# Altium PCB PCB2.PcbDoc
Units mil, origin at the board's own origin, x right, y up, seen from the top; angles counter-clockwise.
Board outline 4880 x 3300 mil, 2 copper layers (Top Layer, Bottom Layer); 26 components, 31 nets, 148 pads, 26 vias.
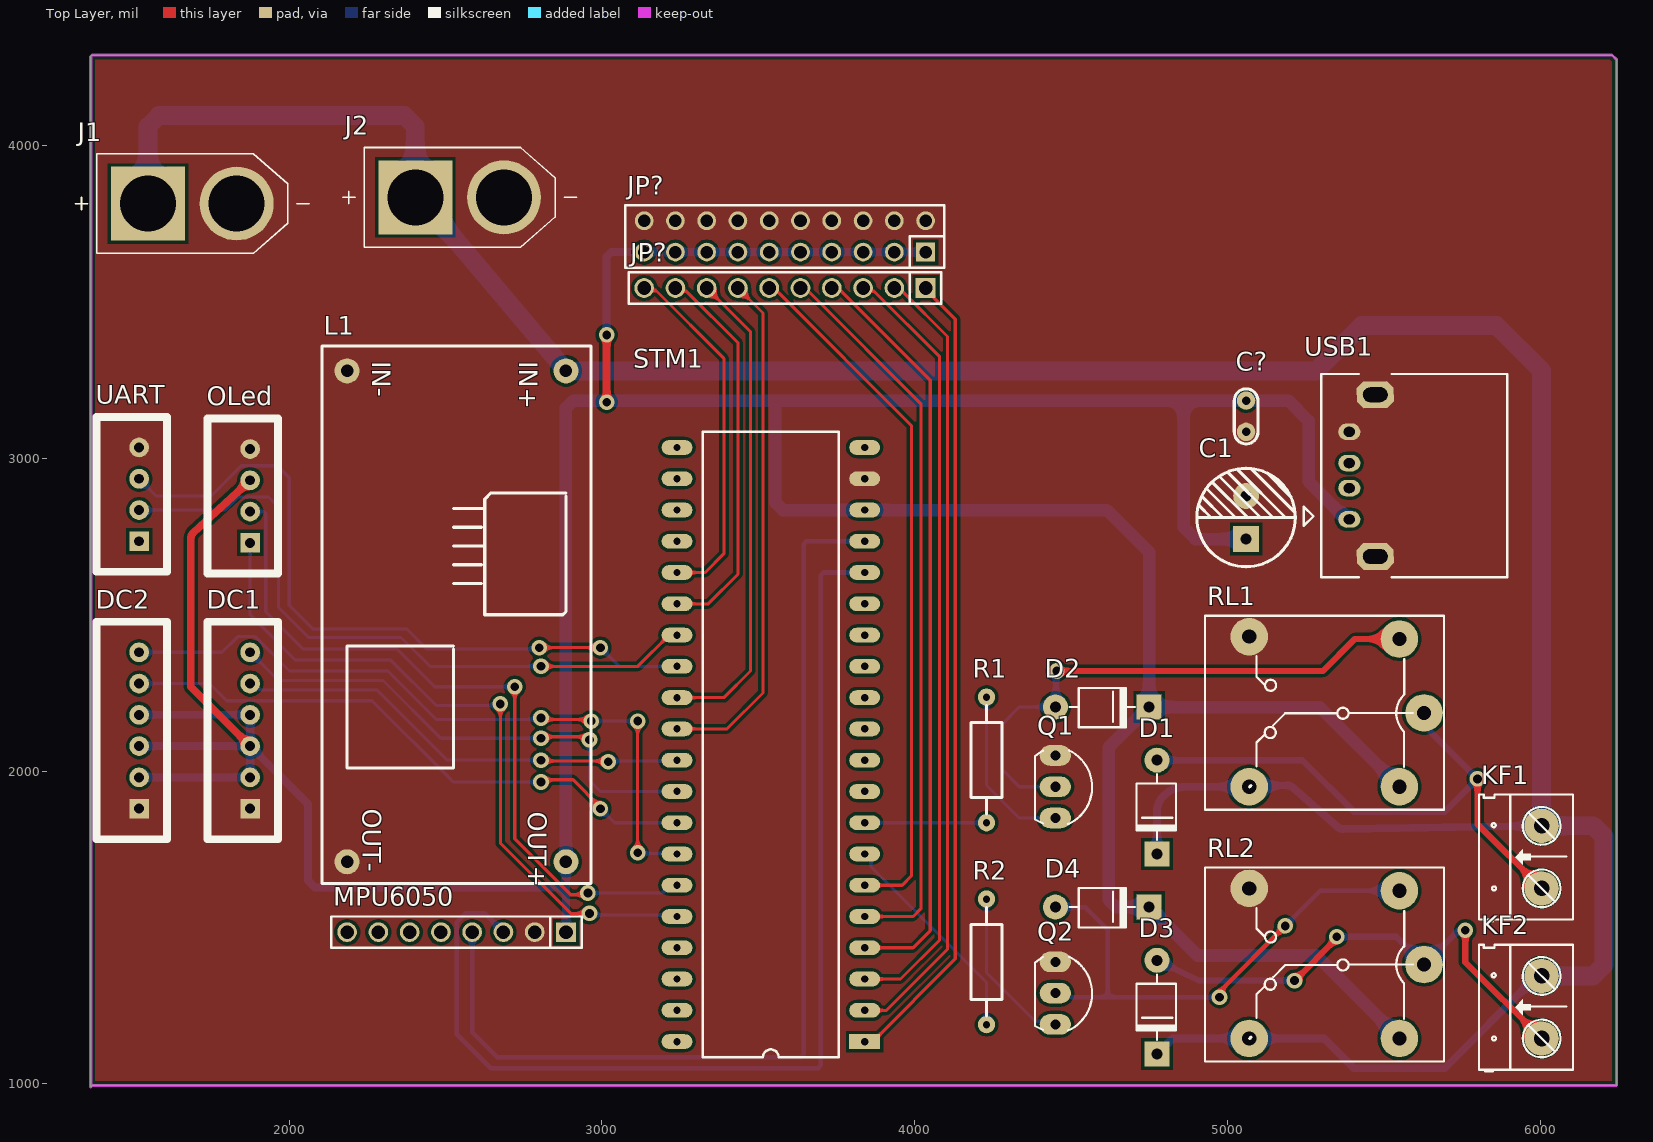
[diagram p0: Top Layer view]
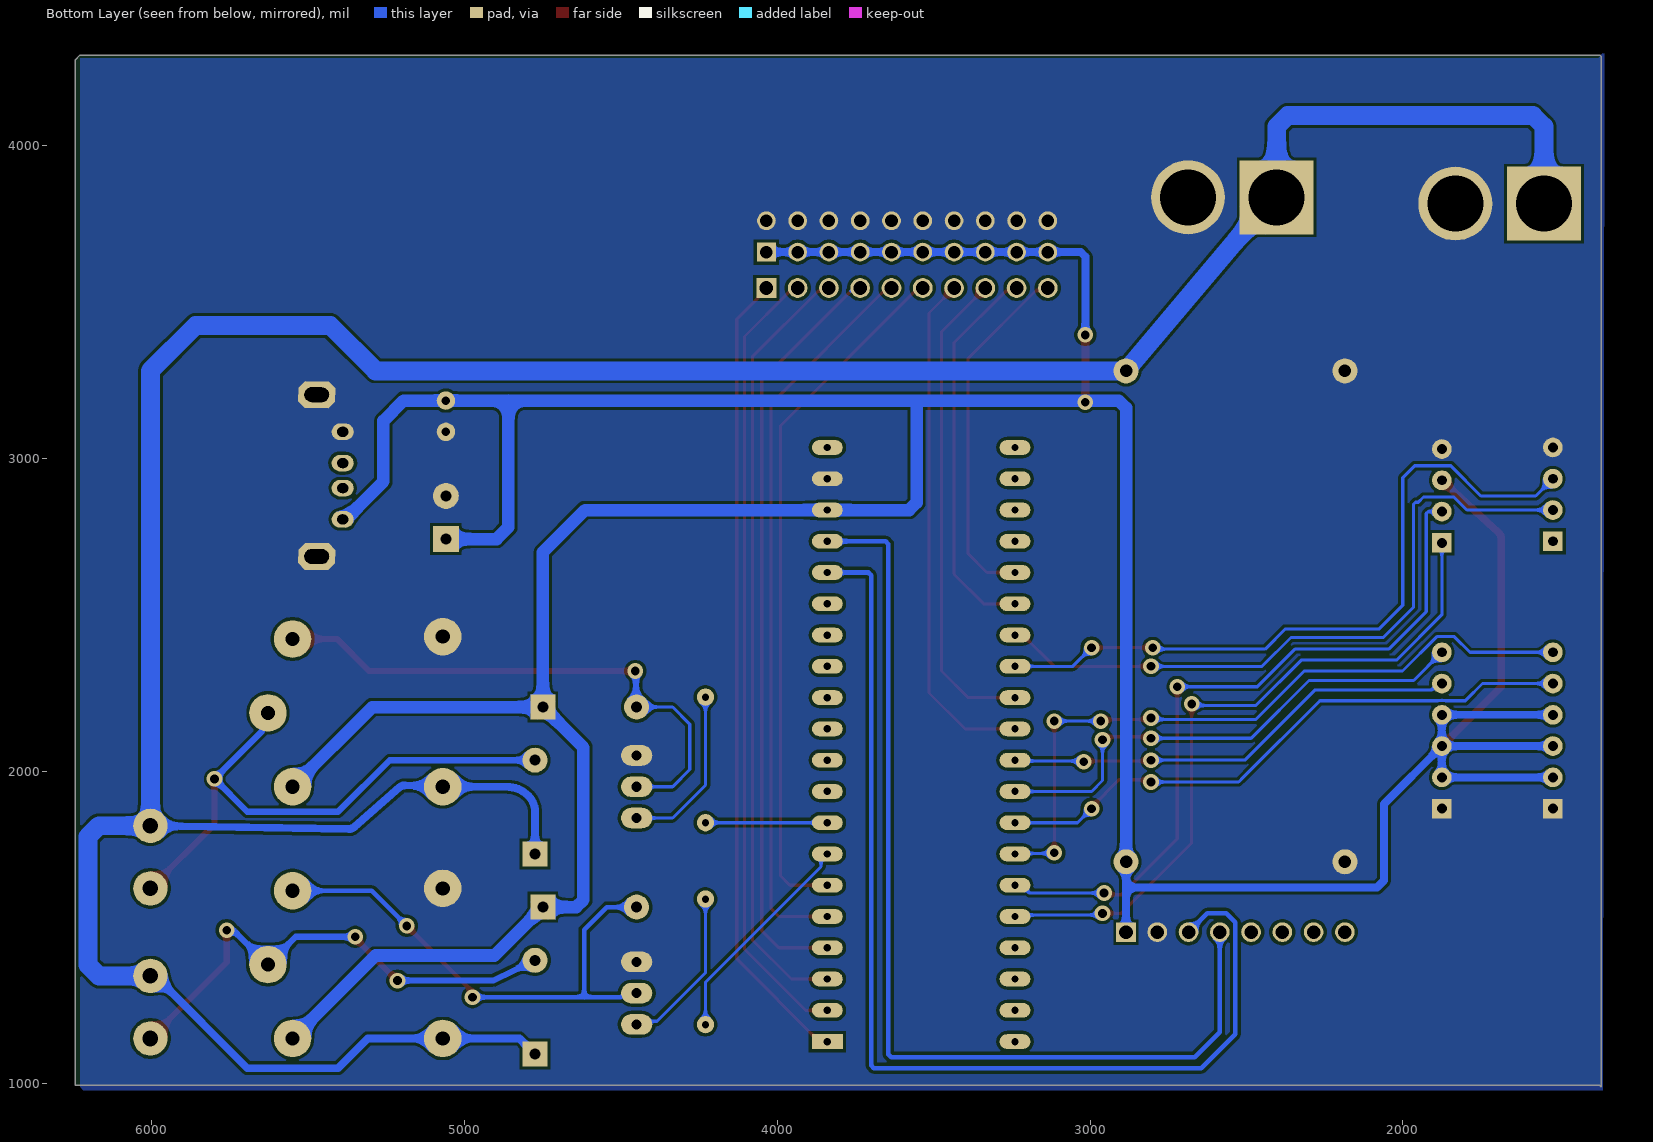
[diagram p1: Bottom Layer view, seen from below]
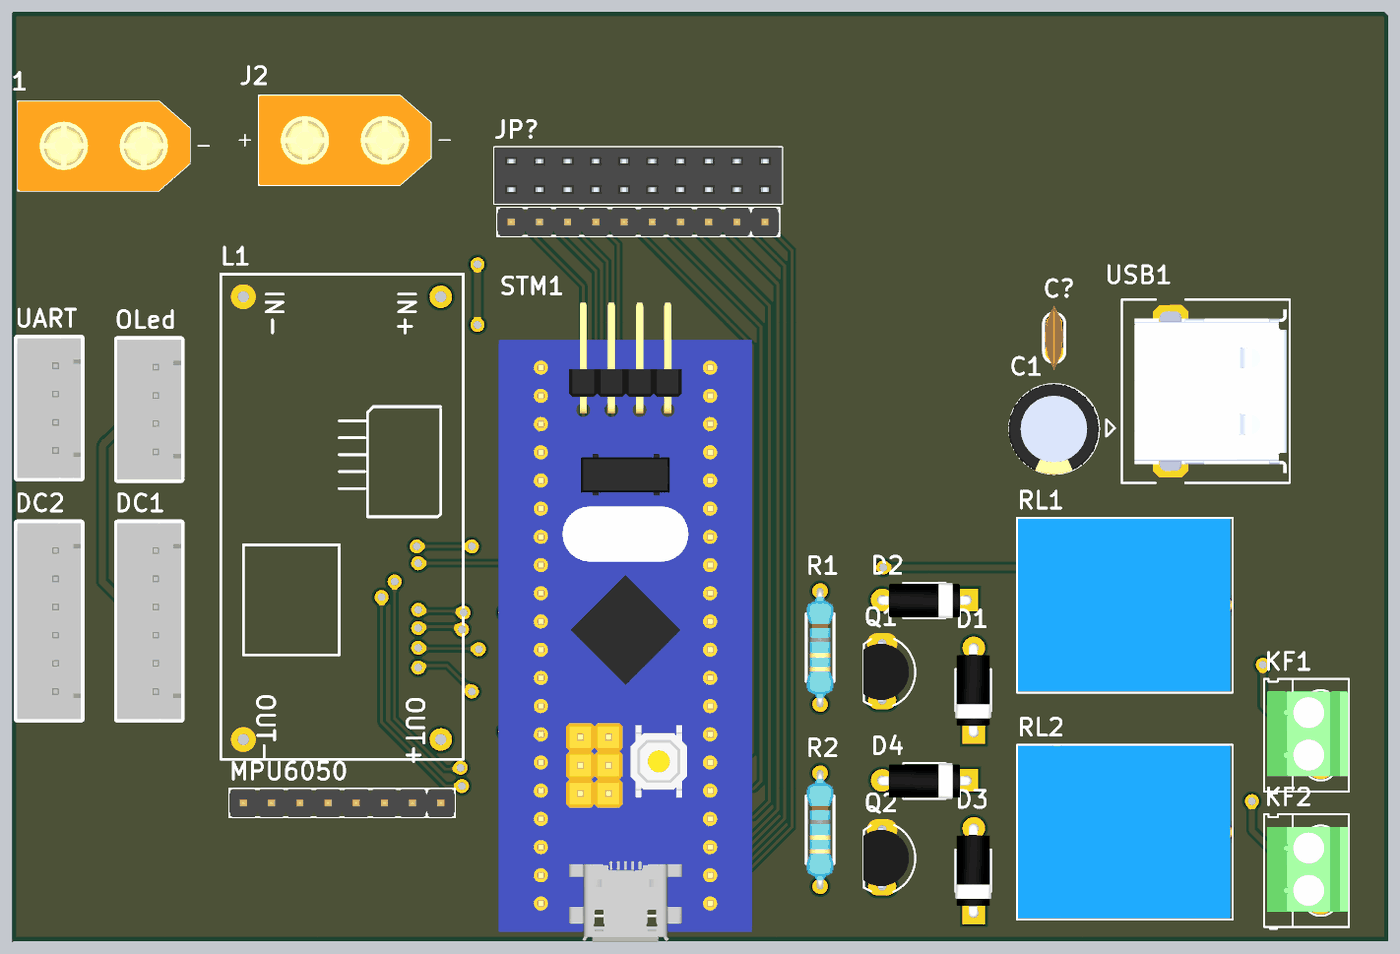
[diagram p2: 3D render of the assembled board from above, using the file's embedded part models]

## Layer stack, top to bottom
Top Solder: solder mask 0.4, Solder Resist, Dk 3.5
Top Layer: signal copper 1.4
Dielectric 1: dielectric 12.6, FR-4, Dk 4.8
Bottom Layer: signal copper 1.4
Bottom Solder: solder mask 0.4, Solder Resist, Dk 3.5

## Board outline
1365,990 1370,995 6245,995 6245,4275 6230,4290 1370,4290 1365,4285

## Design rules (kind name [scope] priority, off if disabled: settings)
Clearance [All] p1: gap=10 ignorepadtopadclearanceinfootprint=FALSE except(0: Arc-Hole Track-Hole SMDPad-Hole THPad-Hole Via-Hole Fill-Hole Poly-Hole Region-Hole Text-Hole)
ComponentClearance [All] p1: gap=0 collisioncheckmode=3 verticalgap=0 showdistances=FALSE
PolygonConnect PolyConnect_Power [InNetClass('Power')] p1: connectstyle=Direct reliefconductorwidth=10 reliefentries=4 polygonreliefangle="90 Angle" airgapwidth=10
PolygonConnect [All] p2: connectstyle=Relief reliefconductorwidth=10 reliefentries=4 polygonreliefangle="90 Angle" airgapwidth=10
RoutingVias [All] p1: holewidth=28 width=50 viastyle="Through Hole" minholewidth=28 minwidth=50 maxholewidth=28 maxwidth=50
SolderMaskExpansion [All] p1: expansion=4 istentingtop=FALSE
Width [InNetClass('Power')] p1: maxlimit=60 minlimit=25 preferedwidth=40
Width Width_1 [All] p2: maxlimit=20 minlimit=10 preferedwidth=15
29 further rules are at their usual default settings.

## Classes and differential pairs
net class Power: +5 +12 GND

## Components (designator, comment, footprint, x,y, rotation, side; value= is the part's Value field where it differs from the comment)
C1 "470uF" "tu hoa 8mm" 5060,2811.1 r90 top
C? "104" "tu gom" 5060,3135 r90 top
D1 "100v" "DIODE 1A" 4775,2085 r90 top
D2 "100v" "DIODE 1A" 4400,2205 r180 top
D3 "100v" "DIODE 1A" 4775,1445 r90 top
D4 "100v" "DIODE 1A" 4400,1565 r180 top
DC1 "Header 6P 2.54 Duc Thang" XH2.54M-6 1875,1880 r90 top
DC2 "Header 6P 2.54 Duc Thang" XH2.54M-6 1520,1880 r90 top
J1 "XT60-M" AMASS_XT60-M 1690,3815 r0 top
J2 "XT60-M" AMASS_XT60-M 2545,3835 r0 top
JP? "JP 1x10 2.54" "JP 1x10 DT" 4035,3545 r180 top
JP? "JP 2x10 2.54" "JP 2x10 CT" 3585,3710 r180 top
KF1 "CON 2 KF301" "Con 2 KF301 5.08" 6005,1625 r90 top
KF2 "CON 2 KF301" "Con 2 KF301 5.08" 6005,1145 r90 top
L1 "BUCK_LM2596" BUCK_LM2596 2565,2510 r270 top
MPU6050 "JP 1x8 2.54" "JP 1x8 DT" 2885,1485 r180 top
OLed "Header 4P 2.54 Duc Thang" XH2.54M-4 1875,2730 r90 top
Q1 "C1815" TO92 4450,1950 r270 top value=C9014
Q2 "C1815" TO92 4450,1290 r270 top value=C9014
R1 "1k" "tro vach 1/4w" 4230,2035.79 r90 top
R2 "1k" "tro vach 1/4w" 4230,1390 r90 top
RL1 "Relay" "Relay 5 Chan SRD" 5629.06,2186.22 r180 top
RL2 "Relay" "Relay 5 Chan SRD" 5629.06,1381.22 r180 top
STM1 "KIT STM32F103C8T6" "STM32F103 KIT" 3840,1135 r180 top
UART "Header 4P 2.54 Duc Thang" XH2.54M-4 1520,2735 r90 top
USB1 "USB A CN DIP" "USB A CN DIP" 5560,2940 r270 top

## Footprints (in the part's own frame and the unit in brackets; to place one, negate y for a bottom-side part, rotate by r counter-clockwise, add the part's x,y. Pads: shape width x height; smd on the part's side, far side on the other; paste and mask are expansions set on the pad)
AMASS_XT60-M [mm]
  round 6 hole 4.55: N(3.6,0)
  rect 6x6 / inner round 6 / far side rect 6x6 hole 4.55: P(-3.6,0)
  silkscreen extent -9.5,-4.05 9.5,4.05, body extent -7.75,-4.05 7.75,4.05, height 16
BUCK_LM2596 [mil]
  round 80 hole 40: 1(-770,320) 2(-770,-380) 3(800,-380) 4(800,320)
  silkscreen extent -850,-460 870,400
"Con 2 KF301 5.08" [mil]
  round 110 hole 50: 1(0,0) 2(200,0)
  silkscreen extent -106,-100 300,200, body extent -45,-97 255,190, height 335
"DIODE 1A" [mil] "Diode 1A"
  round 80 hole 35: 1(-50,0)
  rect 80x80 hole 35: 2(-350,0)
  silkscreen extent -305,-61 -95,65, body extent -366,-61 -34,65, height 122
"JP 1x8 DT" [mm] "8 pins, 1 row, straight, gold plating"
  rect 1.6x1.6 hole 1.1: 1(0,0)
  round 1.6 hole 1.1: 2(2.54,0) 3(5.08,0) 4(7.62,0) 5(10.16,0) 6(12.7,0) 7(15.24,0) 8(17.78,0)
  silkscreen extent -1.27,-1.27 19.05,1.27, body extent -1.27,-1.27 19.05,1.27, height 8.54
"JP 1x10 DT" [mm] "10 pins, 1 row, straight, gold plating"
  rect 1.6x1.6 hole 1.1: 1(0,0)
  round 1.6 hole 1.1: 2(2.54,0) 3(5.08,0) 4(7.62,0) 5(10.16,0) 6(12.7,0) 7(15.24,0) 8(17.78,0) 9(20.32,0) 10(22.86,0)
  silkscreen extent -1.27,-1.27 24.13,1.27, body extent -1.27,-1.27 24.13,1.27, height 8.54
"JP 2x10 CT" [mm] "20 pins, dual row, straight, gold plating"
  rect 1.52x1.52 hole 1.02: 1(-11.43,1.27)
  round 1.52 hole 1.02: 2(-8.89,1.27) 3(-6.35,1.27) 4(-3.81,1.27) 5(-1.27,1.27) 6(1.27,1.27) 7(3.81,1.27) 8(6.35,1.27) 9(8.89,1.27) 10(11.43,1.27) 11(11.43,-1.27) 12(8.89,-1.27) 13(6.35,-1.27) 14(3.81,-1.27) 15(1.27,-1.27) 16(-1.27,-1.27) 17(-3.81,-1.27) 18(-6.35,-1.27) 19(-8.89,-1.27) 20(-11.43,-1.27)
  silkscreen extent -12.95,-2.54 12.95,2.54, body extent -12.95,-2.54 12.95,2.54, height 8.51
"Relay 5 Chan SRD" [mil] "Relay SPDT, 5 pin, 10A,W 650mil, L 800mil, H 800mil"
  round 120 hole 45: 1(0,0) 2(559.06,236.22) 3(559.06,-243.78) 4(78.74,-236.22) 5(78.74,236.22)
  silkscreen extent -63,-311 700,310, body extent -55,-306 697,304, height 602
"STM32F103 KIT" [mm]
  rect 2.5x1.2 hole 0.6: 1(0,0)
  oval 2.5x1.2 hole 0.6: 2(0,-2.54) 3(0,-5.08) 4(0,-7.62) 5(0,-10.16) 6(0,-12.7) 7(0,-15.24) 8(0,-17.78) 9(0,-20.32) 10(0,-22.86) 11(0,-25.4) 12(0,-27.94) 13(0,-30.48) 14(0,-33.02) 15(0,-35.56) 16(0,-38.1) 17(0,-40.64) 18(0,-43.18) 19(0,-45.72) 20(0,-48.26) 21(15.24,-48.26) 22(15.24,-45.72) 23(15.24,-43.18) 24(15.24,-40.64) 25(15.24,-38.1) 26(15.24,-35.56) 27(15.24,-33.02) 28(15.24,-30.48) 29(15.24,-27.94) 30(15.24,-25.4) 31(15.24,-22.86) 32(15.24,-20.32) 33(15.24,-17.78) 34(15.24,-15.24) 35(15.24,-12.7) 36(15.24,-10.16) 37(15.24,-7.62) 38(15.24,-5.08) 39(15.24,-2.54) 40(15.24,0)
  silkscreen extent 2.08,-49.53 13.16,1.27, body extent -3.81,-53.97 19.05,3.59, height 16.12
TO92 [mil] "TO-92"
  oval 66x100 hole 32: 1(-100,0) 2(0,0) 3(100,0)
  silkscreen extent -117,-65 120,118, body extent -109,-66 109,95, height 245
"tro vach 1/4w" [mm]
  round 1.4 hole 0.6: 1(-5.1,0) 2(5.1,0)
  silkscreen extent -4.39,-1.25 4.42,1.25, body extent -5.38,-1.2 5.38,1.2, height 2.41
"tu gom" [mm] "Tu gom mini"
  round 1.5 hole 0.7: 1(-1.27,0) 2(1.27,0)
  silkscreen extent -2.25,-0.97 2.22,0.97, body extent -2.92,-0.85 2.92,0.85, height 6.12
"tu hoa 8mm" [mm]
  rect 2.1x2.1 hole 0.9: 1(-1.75,0)
  round 2.1 hole 0.9: 2(1.75,0)
  silkscreen extent -4,-4 4,4, body extent -4.1,-4.07 4.1,4.13, height 13.81
"USB A CN DIP" [mm] "THT, USB 2.0 A Connector, 4Pin, Body 15.8 x14.5mm"
  oval 1.35x1.8 hole 0.8 slot 0.9 at 90.92 deg rot 0.92: 1(3.429,-4.318) 2(0.889,-4.318) 3(-1.143,-4.318) 4(-3.683,-4.318)
  oct 2.2x3 hole 1.2 slot 2 at 90.92 deg rot 0.92: 4(-6.697,-2.206) 4(6.443,-2.206)
  silkscreen extent -8.38,-8 8.13,8.51, body extent -8.03,-5.46 7.77,8.24, height 6.97
XH2.54M-4 [mm]
  rect 1.6x1.6 hole 0.8: 1(0,0)
  round 1.6 hole 0.8: 2(2.54,0) 3(5.08,0) 4(7.62,0)
  silkscreen extent -2.48,-2.26 10.1,3.46, body extent -2.48,-2.26 10.1,3.48, height 6.91
XH2.54M-6 [mm]
  rect 1.6x1.6 hole 0.8: 1(0,0)
  round 1.6 hole 0.8: 2(2.54,0) 3(5.08,0) 4(7.62,0) 5(10.16,0) 6(12.7,0)
  silkscreen extent -2.48,-2.26 15.18,3.46, body extent -2.48,-2.26 15.18,3.48, height 6.91

## Part data
C1: library part "Tu Hoa 470uF 25V 8x13", "Cắm", Chung_Loai=Cắm, Don_Vi=Con, Ma_Hang="MH 470uF 25V", So_Chan=2, Ten_Linh_Kien="Tụ Hóa 470uF 25V"
C?: library part "Tu gom 104 50V", "Cắm", Chung_Loai=Cắm, Don_Vi=Con, Ma_Hang=MH004761, So_Chan=2, Ten_Linh_Kien="Tụ gốm 104 100nF 50V"
D1 D2 D3 D4: library part "Diode 1N4007", "Cắm", Chung_Loai=Cắm, Don_Vi=Con, Ma_Hang=MH001063, Ten_Linh_Kien="Diode 1N4007 1A (DIP)"
DC1 DC2 KF1 KF2 OLed UART: "Cắm", Chung_Loai=Cắm, Don_Vi=Con
  DC1 DC2: Ma_Hang=MH001972, Ten_Linh_Kien="Header 6P XH2.54-6P Đực Thẳng"
  KF1 KF2: Ma_Hang=MH000987, Ten_Linh_Kien="CON 2 KF301-2P 5.08MM Xanh Dương"
  OLed UART: Ma_Hang=MH001285, Ten_Linh_Kien="Header 4P XH2.54-4P Đực Thẳng"
J1 J2: "Plug; DC supply; XT60; male; PIN: 2; for cable; soldered; 30A; 500V", Package=Package, Check_prices=https://www.snapeda.com/parts/XT60-M/AMASS/view-part/?ref=eda, MF=AMASS, MP=XT60-M, SnapEDA_Link=https://www.snapeda.com/parts/XT60-M/AMASS/view-part/?ref=snap
JP?: library part "JP 1x10 2.54 Duc Thang", "Cắm", Chung_Loai=Cắm, Don_Vi=Con, Ma_Hang=MH000903, Ten_Linh_Kien="Jump Đơn Đực 2.54MM 1x40P Thẳng 11MM"
JP?: library part "JP 2x10 2.54 Cai Thang", "Cắm", Chung_Loai=Cắm, Don_Vi=Con, Ma_Hang=MH008647, Ten_Linh_Kien="Jump Đôi Cái 2.54MM 2x20P Thẳng"
MPU6050: library part "JP 1x8 2.54 Duc Thang", "Cắm", Chung_Loai=Cắm, Don_Vi=Con, Ma_Hang=MH000903, Ten_Linh_Kien="Jump Đơn Đực 2.54MM 1x40P Thẳng 11MM"
Q1 Q2: library part "Trans C1815 DIP", "NPN transistor"
R1 R2: library part "Tro Vach 1/4w 5% 5.1k", "Cắm", Chung_Loai=Cắm, Don_Vi=Con, Ma_Hang=MH007322, So_Chan=2, Ten_Linh_Kien="Trở Vạch 1/4w 5% 5.1k"
RL1 RL2: library part "Relay 5 Chan SRD", "Relay 5 Chan", Ma_Hang=MH009374, Ten="Relay 5V10A SRD-05VDC-SL-C Chính Hãng"
STM1: library part "STM32f103 Bluepill", "KIT STM32F103C8T6 Bluepill"
USB1: "USB Type A", Ma_Hang=MH000941, Ten="USB A Cái DIP"

## Via types
v1: diameter 50, hole 28, Top Layer to Bottom Layer, 26 vias

## Nets (pads, with @x,y where several pads share a name; then routed paths per layer and width w, separated by ;. In a path a pad name is that pad's centre, name@x,y a point inside that pad or via, vN(x,y) a via of type N, cw(c..) or ccw(c..) an arc to the next point about the centre after c; other vN are vias at no path point)
+5: C1.1 C?.2 D2.2 D4.2 DC1.2 DC1.3 DC1.4 DC2.2 DC2.3 DC2.4 JP?.1@4035,3660 JP?.2@3935,3660 JP?.3@3835,3660 JP?.4@3735,3660 JP?.5@3635,3660 JP?.6@3535,3660 JP?.7@3435,3660 JP?.8@3335,3660 JP?.9@3235,3660 JP?.10@3135,3660 L1.4 MPU6050.1 OLed.3 RL1.5 RL2.5 STM1.18 USB1.1 | length 14967.8
  Top Layer w25: DC1.3 1685,2270 1685,2744.04 cw(c1710,2744.04) 1693.06,2762.43 OLed.3 ; v1(3015,3180) v1(3015,3395)
  Bottom Layer w25: DC2.2 DC1.2 DC1.3 ; DC2.3 DC1.3 ; DC2.4 DC1.4 DC1.3 ; MPU6050.1 L1.4 ; 2885.32,1627.82 2082.18,1627.82 2060,1650 2060,1895 DC1.3 ; v1(3015,3395) 3015,3645.36 3029.64,3660 3135,3660 3235,3660 3335,3660 3435,3660 3535,3660 3635,3660 3735,3660 3835,3660 3935,3660 JP?.1@4035,3660
  Bottom Layer w40: L1.4 2885,3161.57 2908.43,3185 3565,3185 ; C1.1 4897.8,2742.2 4860,2780 4860,3185 ; USB1.1 5381.28,2805 5260,2926.28 5260,3120 5195,3185 C?.2 4860,3185 ; RL2.5 5285,1410.32 4904.69,1410.32 D4.2 4643.43,1565 4620,1588.43 4620,2075 D2.2 ; RL1.5 5295.32,2205 D2.2 ; 3565,3185 4860,3185 ; 3565,3185 3555,3175 3555,2858.43 3578.43,2835 STM1.18 4615,2835 4750,2700 D2.2
+12: D1.2 D3.2 J1.P J2.P KF1.2 KF2.2 L1.1 RL1.2 RL2.2 | length 10534
  Bottom Layer w25: D3.2 4825,1145 RL2.2 5310,1145 5405,1050 5695,1050 5979.39,1334.39 cw(c6005,1308.79) KF2.2 ; D1.2@4801.52,1761.52 D1.2 4775,1870.71 cw(c4845.71,1870.71) 4795.71,1920.71 cw(c4866.42,1850) 4866.42,1950 RL1.2 5190.06,1954.62 5190.12,1954.62 cw(c5191.02,1929.64) 5207.49,1948.45 5352.76,1821.33 5352.82,1821.29 ccw(c5369.23,1840.15) 5369.56,1815.15 KF1.2
  Bottom Layer w60: J1.P 1548.27,4061.59 1583.41,4096.73 2368.12,4096.73 2403.27,4061.59 J2.P 2491.38,3746.89 L1.1 5285,3280 5430,3425 5860,3425 6005,3280 KF1.2 6169.85,1825 6205,1789.85 6205,1380.15 6169.85,1345 KF2.2
A0: JP?.10@3135,3545 STM1.25 | length 1148.1
  Top Layer w10: JP?.10@3135,3545 3142.88,3537.12 3172.88,3537.12 3390,3320 3390,2695 3330,2635 STM1.25
A1: JP?.9@3235,3545 STM1.26 | length 1246.8
  Top Layer w10: JP?.9@3235,3545 3245.14,3534.86 3270.14,3534.86 3435,3370 3435,2630 3340,2535 STM1.26
A4: JP?.8@3335,3545 STM1.29 | length 1553.2
  Top Layer w10: STM1.29 3390,2235 3475,2320 3475,3405 JP?.8@3335,3545
A5: JP?.7@3435,3545 STM1.30 | length 1650.8
  Top Layer w10: STM1.30 3400,2135 3515,2250 3515,3465 JP?.7@3435,3545
A8: JP?.5@3635,3545 STM1.5 | length 2348.6
  Top Layer w10: JP?.5@3635,3545 3649.34,3545 3664.72,3529.62 3665.38,3529.62 4020,3175 4020,1560 3995,1535 STM1.5
  Bottom Layer w10: JP?.5@3635,3545 JP?.5@3635,3550
A9: JP?.6@3535,3545 STM1.6 | length 2239.7
  Top Layer w10: JP?.6@3535,3545 3549.34,3545 3564.72,3529.62 3565.38,3529.62 3990,3105 3990,1665 3960,1635 STM1.6
B12: JP?.1@4035,3545 STM1.1 | length 2584.5
  Top Layer w10: STM1.1 3865.59,1135 4130,1399.41 4130,3445 4061.5,3513.5 4061.5,3518.5 JP?.1@4035,3545
B13: JP?.2@3935,3545 STM1.2 | length 2542.5
  Top Layer w10: STM1.2 3910,1235 4105,1430 4105,3390 3965.38,3529.62 3964.72,3529.62 3949.34,3545 JP?.2@3935,3545
  Bottom Layer w10: JP?.2@3935,3545 JP?.2@3937.5,3545
B14: JP?.3@3835,3545 STM1.3 | length 2507.1
  Top Layer w10: JP?.3@3835,3545 3845.14,3534.86 3870.14,3534.86 4080,3325 4080,1460 3955,1335 STM1.3
  Bottom Layer w10: JP?.3@3835,3545 JP?.3@3849.18,3545
B15: JP?.4@3735,3545 STM1.4 | length 2464.3
  Top Layer w10: JP?.4@3735,3545 3745.14,3534.86 3765.14,3534.86 4050,3250 4050,1490 3995,1435 STM1.4
  Bottom Layer w10: JP?.4@3735,3545 3745.14,3534.86 3765.14,3534.86
GND: C1.2 C?.1 DC1.1 DC2.1 J1.N J2.N JP?.11 JP?.12 JP?.13 JP?.14 JP?.15 JP?.16 JP?.17 JP?.18 JP?.19 JP?.20 L1.2 L1.3 MPU6050.2 OLed.4 Q1.1 Q2.1 RL1.3 RL2.3 STM1.19 UART.4 USB1.4
LPMW1: DC1.5 STM1.31 | length 1470.6
  Top Layer w10: v1(2805,2035) 2807.5,2032.5 3017.5,2032.5 v1(3020,2030)
  Bottom Layer w10: DC1.5 1887.35,2280 1907.35,2260 2280,2260 2505,2035 v1(2805,2035) ; v1(3020,2030) 3022.5,2032.5 3237.5,2032.5 STM1.31
LPMW2: DC2.5 STM1.33 | length 1913.5
  Top Layer w10: v1(2805,1965) 2812.28,1972.28 2907.72,1972.28 2995,1885 v1(2995,1880)
  Bottom Layer w10: DC2.5 1745,2280 1797.07,2227.93 1800,2225 1863.3,2225 cw(c1875,2180) 1886.7,2225 2265,2225 2267.93,2222.07 2510,1980 2525,1965 v1(2805,1965) ; v1(2995,1880) 3040,1835 STM1.33
NetD1_1: D1.1 KF1.1 RL1.1 | length 1853.8
  Top Layer w20: v1(5800,1975) 5800,1830 KF1.1
  Bottom Layer w20: D1.1 5240,2035 5405,1870 5695,1870 v1(5800,1975) 5648.19,2126.81 5648.19,2167.09 RL1.1
NetD2_1: D2.1 Q1.2 RL1.4 | length 1785.8
  Top Layer w20: v1(4454.21,2320) 5305,2320 5407.44,2422.44 RL1.4
  Bottom Layer w10: Q1.2 4335,1950 4280,2005 4280,2150 4335,2205 D2.1
  Bottom Layer w20: D2.1 4452.11,2207.11 4452.11,2317.89 v1(4454.21,2320)
NetD3_1: D3.1 KF2.1 RL2.1 | length 1591.5
  Top Layer w20: v1(5215,1330) 5350,1465 v1(5350,1470) ; v1(5761.24,1491.24) 5761.24,1388.76 KF2.1
  Bottom Layer w20: D3.1 4910,1330 v1(5215,1330) ; v1(5350,1470) 5540.28,1470 RL2.1 5737.83,1490 5760,1490 v1(5761.24,1491.24)
NetD4_1: D4.1 Q2.2 RL2.4 | length 1670.5
  Top Layer w15: v1(4975,1276.98) 4975,1295 v1(5185,1505)
  Bottom Layer w15: Q2.2 4459.76,1280.24 4498.03,1280.24 4501.29,1276.98 4618.02,1276.98 ; D4.1 4545,1565 4618.02,1491.98 4618.02,1276.98 ; v1(4975,1276.98) 4618.02,1276.98 ; v1(5185,1505) 5297.44,1617.44 RL2.4
NetQ1_3: Q1.3 R1.2 | length 545.1
  Bottom Layer w10: R1.2 4230,1955 4335,1850 Q1.3
NetQ2_3: Q2.3 R2.2 | length 524.1
  Bottom Layer w10: R2.2 4230,1355 4385,1200 4440,1200 Q2.3
RPMW1: DC1.6 STM1.32 | length 1635.5
  Top Layer w10: v1(2805,2105) 2810,2110 2960,2110 v1(2960,2100.28)
  Bottom Layer w10: DC1.6 1965,2290 2300,2290 2485,2105 v1(2805,2105) ; v1(2960,2100.28) 2960,1970 2995,1935 STM1.32
RPMW2: DC2.6 STM1.34 | length 2279.6
  Top Layer w10: v1(2805,2170) 2810,2165 2960.77,2165 v1(2965.77,2160) ; v1(3114.14,1738.57) v1(3114.14,2160)
  Bottom Layer w10: DC2.6 1785,2380 1835,2430 1890.76,2430 2000.76,2320 2315,2320 2470,2165 2800,2165 v1(2805,2170) ; v1(2965.77,2160) v1(3114.14,2160) ; v1(3114.14,1738.57) 3115.92,1736.79 3238.21,1736.79 STM1.34
Rx: STM1.28 UART.3 | length 2294.8
  Top Layer w10: v1(2799.57,2394.75) v1(2995.11,2394.75)
  Bottom Layer w10: UART.3 1575,2880 1750,2880 1846.5,2976.5 1961.5,2976.5 2000,2937.99 2000,2530 2075,2455 2375,2455 2440,2390 2800,2390 2799.57,2390.43 v1(2799.57,2394.75) ; v1(2995.11,2394.75) 3054.86,2335 STM1.28
SCL-MPU: MPU6050.3 STM1.16 | length 3466.7
  Bottom Layer w15: MPU6050.3 2625,1545 2565,1545 2536,1516 2536,1159 2645,1050 3691.21,1050 3700,1058.79 3700,2626.21 3708.79,2635 STM1.16
SCL-OLed: OLed.2 STM1.35 | length 2353.9
  Top Layer w10: v1(2721.23,2270) 2721.23,1783.77 2900.25,1604.75 2949.75,1604.75 v1(2955,1610)
  Bottom Layer w10: OLed.2 1919.14,2830 1925,2824.14 1925,2510 2045,2390 2345,2390 2465,2270 v1(2721.23,2270) ; v1(2955,1610) 3193.07,1610 3218.07,1635 STM1.35
SDA-MPU: MPU6050.4 STM1.17 | length 3247.8
  Bottom Layer w15: MPU6050.4 2585,1165 2665,1085 3636.21,1085 3645,1093.79 3645,2726.21 3653.79,2735 STM1.17
SDA-Oled: OLed.1 STM1.36 | length 2259.5
  Top Layer w10: v1(2675,2215) 2675,1770 2900,1545 v1(2960,1545)
  Bottom Layer w10: OLed.1 1875,2500 2020,2355 2325,2355 2470,2210 2670,2210 v1(2675,2215) ; v1(2960,1545) 2965,1540 3235,1540 STM1.36
Signal1: R1.1 STM1.8 | length 390
  Bottom Layer w10: STM1.8 R1.1
Signal2: R2.1 STM1.7 | length 709.3
  Bottom Layer w10: STM1.7 3843.39,1735 3860.59,1717.8 3860.59,1694.62 4230,1325.21 R2.1
Tx: STM1.27 UART.2 | length 2195.7
  Top Layer w10: v1(2805,2335) 3114.41,2335 3214.41,2435 STM1.27
  Bottom Layer w10: UART.2 1795,2835 1836.5,2876.5 1933.5,2876.5 1950,2860 1959.14,2860 1965,2854.14 1965,2525 2062.5,2427.5 2357.5,2427.5 2450,2335 v1(2805,2335)
pads on no net: MPU6050.5 MPU6050.6 MPU6050.7 MPU6050.8 STM1.9 STM1.10 STM1.11 STM1.12 STM1.13 STM1.14 STM1.15 STM1.20 STM1.21 STM1.22 STM1.23 STM1.24 STM1.37 STM1.38 STM1.39 STM1.40 UART.1 USB1.2 USB1.3

## Polygon pours and split planes (outlines as drawn)
GND on Bottom Layer "GND_L02_P000" (solid, pour order 0): 1355,4300 1375,4280 6230,4280 6230,990 6220,980 1360,980
GND on Top Layer "GND_L01_P001" (solid, pour order 1): 1355,4280 1357.5,4282.5 6237.5,4282.5 6237.5,987.5 6235,985 6227.5,992.5 1367.5,992.5

## Keep-outs
Top Layer:
  lines w10: 1365,990 1370,995 6245,995 6245,4275 6230,4290 1370,4290 1365,4285 1365,4165 1365,990

## Text inside footprints (layer, text, board x,y; h text height)
L1: Top Overlay "OUT-" at 2235,1880 h60 r270; Top Overlay "OUT+" at 2765,1870 h60 r270; Top Overlay "IN-" at 2265,3310 h60 r270; Top Overlay "IN+" at 2735,3310 h60 r270